# EAGLE board sensorstation_ok2 (EAGLE 6.2)
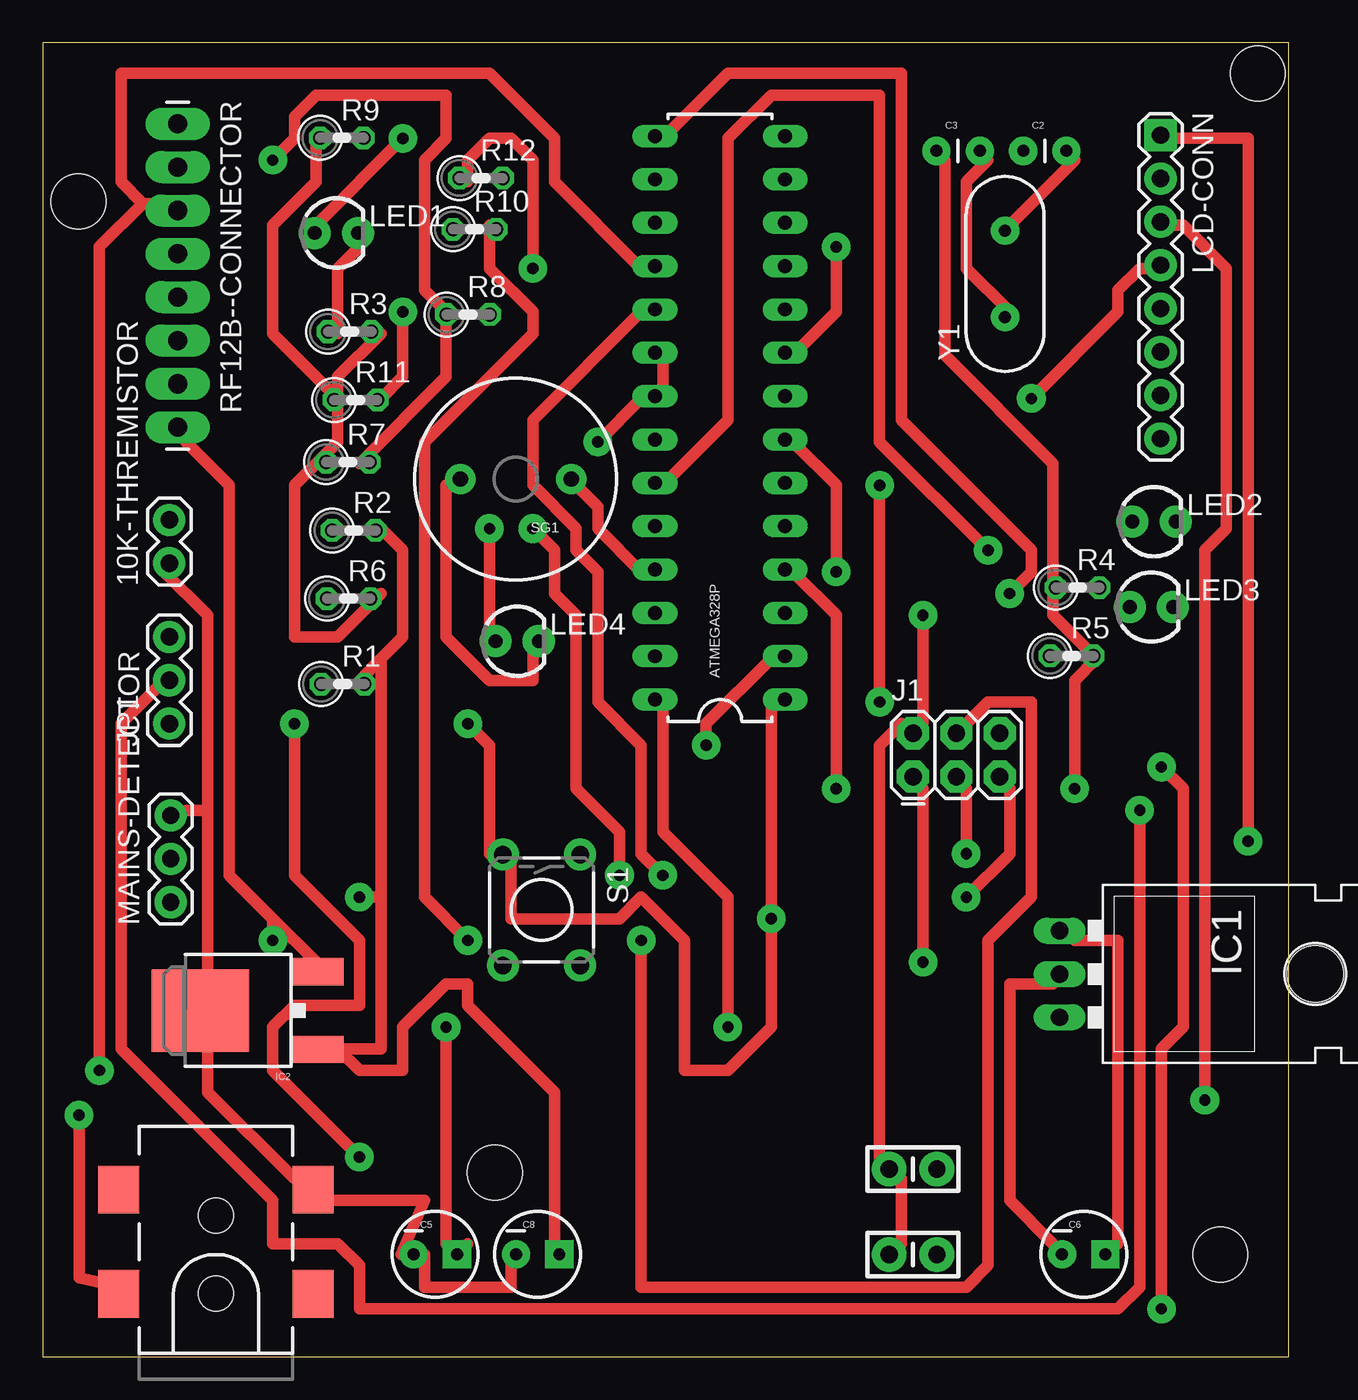
[diagram p0: board, top side]
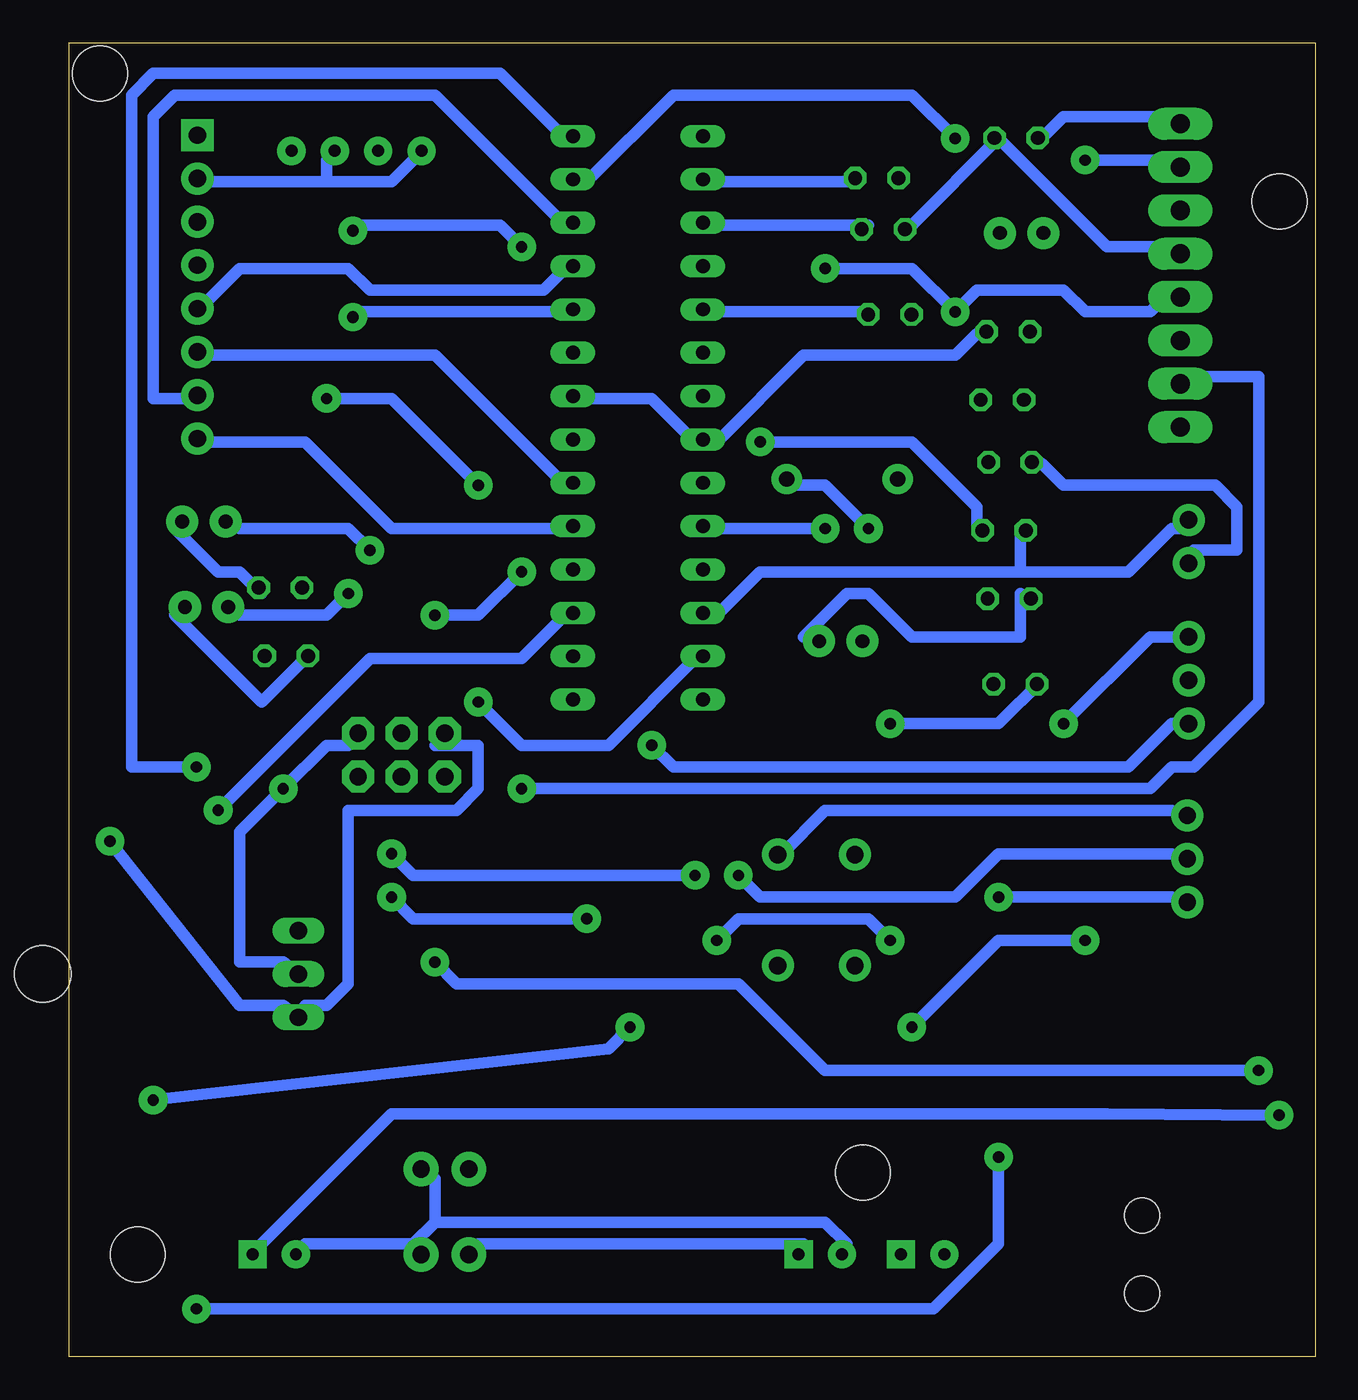
[diagram p1: board, bottom side, seen from below]

Size 73 x 77 mm. Coordinates in mm from the lower left corner, seen from the top.
Outline: 0,0 73,0 73,77 0,77 0,0
Copper layers (1*16): Top 0.035mm / dielectric 1.5mm / Bottom 0.035mm
Design rules: minimum track width 26mil, minimum drill 26mil, track to track 10mil, track to pad 20mil, pad to pad 10mil, via to via 20mil, smd to smd 8mil, copper to edge 40mil, drill to drill 8mil, minimum pad ring 10mil, minimum via ring 20mil, stop-mask expansion 1mil, vias tented up to drill 0mil, thermal gap 10mil
Holes 3.2 mm at 69,6 71.2,75.2 2.1,67.7 26.5,10.8

## Footprints (pad centres in the part's own frame; a part is rotated, then mirrored left to right if it is on the bottom)
1X02 = drill 1.016 pad 1.88: 1 0,0; 2 2.54,0
DIL28-3 = drill 0.813 long: 1 -16.51,-3.81; 2 -13.97,-3.81; 3 -11.43,-3.81; 4 -8.89,-3.81; 5 -6.35,-3.81; 6 -3.81,-3.81; 7 -1.27,-3.81; 8 1.27,-3.81; 9 3.81,-3.81; 10 6.35,-3.81; 11 8.89,-3.81; 12 11.43,-3.81; 13 13.97,-3.81; 14 16.51,-3.81; 15 16.51,3.81; 16 13.97,3.81; 17 11.43,3.81; 18 8.89,3.81; 19 6.35,3.81; 20 3.81,3.81; 21 1.27,3.81; 22 -1.27,3.81; 23 -3.81,3.81; 24 -6.35,3.81; 25 -8.89,3.81; 26 -11.43,3.81; 27 -13.97,3.81; 28 -16.51,3.81
CAP-PTH-SMALL = drill 0.7 pad 1.651: 1 0,0; 2 2.54,0
CAP-PTH-SMALL-KIT = drill 1.016 pad 2.032: 1 -1.397,0; 2 1.397,0
CPOL-RADIAL-10UF-25V = drill 0.7 pad 1.651 square: 1 1.27,0 | drill 0.7 pad 1.651: 2 -1.27,0
TO-220-ALT = drill 1.016 long: GND 0,-3.81; IN -2.54,-3.81; OUT 2.54,-3.81 | hole 3.302: 0,11.176
DPAK = smd 1.6 x 3: 1 -2.28,-5.31; 3 2.28,-5.31 | smd 4.826 x 5.715: 4 0,1.588
2X3 = drill 1.016 pad 1.88 octagon: 1 0,0; 2 0,2.54; 3 2.54,0; 4 2.54,2.54; 5 5.08,0; 6 5.08,2.54
POWER_JACK_SMD = smd 2.8 x 2.4: GND 0,-5.7; P$4 6.1,-5.7; VIN0 0,5.7; VIN1 6.1,5.7 | hole 2.032: 0,0; 4.572,0
1X03 = drill 1.016 pad 1.88: 1 0,0; 2 2.54,0; 3 5.08,0
1X08 = drill 1.016 pad 1.88 square: 1 0,0 | drill 1.016 pad 1.88: 2 2.54,0; 3 5.08,0; 4 7.62,0; 5 10.16,0; 6 12.7,0; 7 15.24,0; 8 17.78,0
LED3MM = drill 0.813 pad 1.88: A -1.27,0; K 1.27,0
0207/2V = drill 0.813 octagon: 1 -1.27,0; 2 1.27,0
1X08_LONGPADS = drill 1.118 pad 1.88 long: 1 0,0; 2 2.54,0; 3 5.08,0; 4 7.62,0; 5 10.16,0; 6 12.7,0; 7 15.24,0; 8 17.78,0
TACTILE-PTH = drill 1.016 pad 1.88: 1 -3.251,2.261; 2 3.251,2.261; 3 -3.251,-2.261; 4 3.251,-2.261
BUZZER-12MM = drill 0.9 pad 1.778: + 3.25,0; - -3.25,0
HC49US = drill 0.7 pad 1.651: 1 -2.54,0; 2 2.54,0

## Placement (x,y rotation side)
10K-THREMISTOR  J2  [1X02]  7.42,46.5 90 top
ATMEGA328P  AVR-MEGA8-PPTH  [DIL28-3]  39.69,55.02 90 top
C2  22pf  [CAP-PTH-SMALL]  57.45,70.66 0 top
C3  22pf  [CAP-PTH-SMALL]  52.37,70.66 0 top
C4  0,47uF  [CAP-PTH-SMALL-KIT]  51,11 0 top
C5  33uF  [CPOL-RADIAL-10UF-25V]  23,6 0 top
C6  33uF  [CPOL-RADIAL-10UF-25V]  61,6 0 top
C7  0,1uF  [CAP-PTH-SMALL-KIT]  51,6 0 top
C8  33uF  [CPOL-RADIAL-10UF-25V]  29,6 0 top
IC1  LM7805  [TO-220-ALT]  63.39,22.43 270 top
IC2  LM2931_FIXED  [DPAK]  10.83,20.29 90 top
J1  AVR_SPI_PRG_6PTH  [2X3]  51,34 0 top
J2  POWER_JACKSMD  [POWER_JACK_SMD]  10.15,3.7 90 top
JP1  J6  [1X03]  7.42,37.1 90 top
LCD-CONN  J5  [1X08]  65.5,71.58 270 top
LED1  MainsI  [LED3MM]  17.21,65.85 0 top
LED2  Led1  [LED3MM]  65.12,48.93 0 top
LED3  Led2  [LED3MM]  64.96,43.93 0 top
LED4  ToneLed  [LED3MM]  27.8,41.93 0 top
MAINS-DETECTOR  J3  [1X03]  7.5,26.64 90 top
R1  10k  [0207/2V]  17.58,39.42 0 top
R2  10k  [0207/2V]  18.23,48.42 0 top
R3  330  [0207/2V]  17.99,60.07 0 top
R4  330  [0207/2V]  60.64,45.07 0 top
R5  330  [0207/2V]  60.29,41.07 0 top
R6  330  [0207/2V]  17.93,44.42 0 top
R7  10k  [0207/2V]  17.88,52.42 0 top
R8  4,7k  [0207/2V]  24.93,61.07 0 top
R9  10k  [0207/2V]  17.53,71.42 0 top
R10  4,7k  [0207/2V]  25.31,66.07 0 top
R11  10k  [0207/2V]  18.34,56.07 0 top
R12  4,7k  [0207/2V]  25.69,69.07 0 top
RF12B--CONNECTOR  J4  [1X08_LONGPADS]  7.91,72.25 270 top
S1  [TACTILE-PTH]  29.23,26.18 270 top
SG1  BUZZERPTH  [BUZZER-12MM]  27.72,51.43 180 top
Y1  16Mhz  [HC49US]  56.39,63.45 90 top

## Library data of the parts
10K-THREMISTOR ATMEGA328P C2-C8 IC1 IC2 J1 J2 JP1 LCD-CONN LED1-LED4 MAINS-DETECTOR RF12B--CONNECTOR S1 SG1 Y1 = SparkFun
R1-R12 = resistor

## Nets
3.3V: C5.1 IC2.3 RF12B--CONNECTOR.8
5V: ATMEGA328P.7 ATMEGA328P.20 ATMEGA328P.21 C4.1 C7.1 C8.1 IC1.OUT IC2.1 J1.2 LCD-CONN.1 MAINS-DETECTOR.1 R1.2 R2.2
GND: 10K-THREMISTOR.1 ATMEGA328P.8 ATMEGA328P.22 C2.1 C3.1 C4.2 C5.2 C6.2 C7.2 C8.2 IC1.GND IC2.4 J1.6 J2.P$4 LCD-CONN.2 MAINS-DETECTOR.3 R3.2 R4.1 R5.2 R6.2 R7.1 R9.1 R11.1 RF12B--CONNECTOR.1 S1.1
N$1: ATMEGA328P.4 RF12B--CONNECTOR.7
N$2: C6.1 IC1.IN J2.VIN0
N$3: ATMEGA328P.19 J1.3 R8.2
N$4: ATMEGA328P.17 J1.4 R10.2
N$6: ATMEGA328P.9 C2.2 Y1.2
N$7: ATMEGA328P.10 C3.2 Y1.1
N$8: ATMEGA328P.24 MAINS-DETECTOR.2
N$9: 10K-THREMISTOR.2 ATMEGA328P.26 R2.1
N$10: LED1.K R3.1
N$11: LED4.K R6.1 SG1.+
N$12: LED2.K R4.2
N$13: LED3.K R5.1
N$14: ATMEGA328P.23 LED2.A
N$15: ATMEGA328P.15 LED3.A
N$16: ATMEGA328P.25 LED4.A SG1.-
N$17: ATMEGA328P.14 JP1.3
N$18: R7.2 R8.1 RF12B--CONNECTOR.2
N$19: R9.2 R10.1 RF12B--CONNECTOR.4
N$20: R11.2 R12.1 RF12B--CONNECTOR.5
N$21: ATMEGA328P.16 R12.2
N$22: ATMEGA328P.13 LED1.A
N$23: ATMEGA328P.18 J1.1 RF12B--CONNECTOR.3
N$24: ATMEGA328P.12 LCD-CONN.7
N$25: ATMEGA328P.11 LCD-CONN.5
N$26: ATMEGA328P.6 LCD-CONN.6
N$27: ATMEGA328P.5 LCD-CONN.8
N$28: ATMEGA328P.3 JP1.2
N$29: ATMEGA328P.2 JP1.1
N$30: ATMEGA328P.27 LCD-CONN.4
N$31: ATMEGA328P.28 LCD-CONN.3
N$34: ATMEGA328P.1 J1.5 R1.1 S1.3

## Tracks (layer width: path | path; a pad name or v marks a point on that pad's centre or on a via)
3.3V  (via drill 0.66)
  Top 0.66: 24.91,6.62 C5.1 23.64,6.62 v23.64,19.32 | 13.48,25.67 10.94,28.21 10.94,51.07 8.4,53.61 RF12B--CONNECTOR.8 | 13.48,25.67 16.02,23.13 IC2.3 | 13.48,25.67 v13.48,24.4
  Bottom 0.66: v23.64,19.32 18.56,24.4 v13.48,24.4
5V  (via drill 0.66)
  Top 0.66: ATMEGA328P.20 36.34,58.69 36.34,56.15 ATMEGA328P.21 35.07,56.15 v32.53,53.61 | 19.83,40.91 21.1,42.18 21.1,47.26 19.83,48.53 R2.2 | 19.83,40.91 18.56,39.64 R1.2 | 17.29,18.05 19.83,18.05 19.83,26.94 | 19.83,40.91 19.83,26.94 | 19.83,26.94 v18.56,26.94 | C7.1 50.31,6.62 50.31,10.43 C4.1 49.04,11.7 49.04,35.83 50.31,37.1 J1.2 51.58,37.1 v51.58,43.45 | v46.5,45.99 46.5,51.07 43.96,53.61 ATMEGA328P.7 | v70.63,30.21 70.63,71.39 65.55,71.39 LCD-CONN.1 | 17.29,18.05 18.56,16.78 21.1,16.78 21.1,19.32 23.64,21.86 24.91,21.86 24.91,20.59 29.99,15.51 29.99,6.62 C8.1 | 17.29,18.05 IC2.1
  Bottom 0.66: v32.53,53.61 23.64,53.61 19.83,49.8 19.83,48.53 R2.2 | v18.56,26.94 8.4,26.94 MAINS-DETECTOR.1 | C8.1 29.99,6.62 49.04,6.62 C7.1 | v46.5,45.99 49.04,43.45 v51.58,43.45 | J1.2 51.58,35.83 49.04,35.83 49.04,33.29 50.31,32.02 56.66,32.02 56.66,21.86 57.93,20.59 59.2,20.59 IC1.OUT 60.47,20.59 63.01,20.59 v70.63,30.21
GND  (via drill 0.66)
  Top 0.66: 16.02,52.34 17.29,53.61 17.29,56.15 | 16.02,52.34 14.75,51.07 14.75,42.18 17.29,42.18 19.83,44.72 R6.2 | 16.02,52.34 R7.1 | 17.29,56.15 17.29,57.42 19.83,59.96 R3.2 | 17.29,56.15 13.48,59.96 13.48,66.31 16.02,68.85 16.02,71.39 R9.1 | 17.29,56.15 R11.1 | 9.67,32.02 9.67,20.59 IC2.4 9.67,19.32 9.67,15.51 14.75,10.43 J2.P$4 16.02,9.16 22.37,9.16 21,6 C5.2 22.37,6 22.37,4.08 27.45,4.08 27.45,5.35 C8.2 | 9.67,32.02 9.67,43.45 7.13,45.99 10K-THREMISTOR.1 | 9.67,32.02 8.4,32.02 MAINS-DETECTOR.3 | 61.74,40.91 59.2,43.45 59.2,44.72 | 59.2,44.72 59.2,52.34 52.85,58.69 52.85,70.12 C3.1 | 59.2,44.72 R4.1 | IC1.GND 59.2,21.86 56.66,21.86 56.66,9.16 59.2,6.62 C6.2 | 61.74,40.91 60.47,39.64 v60.47,33.29 | 61.74,40.91 R5.2
  Bottom 0.66: R9.1 16.02,71.39 14.75,72.66 8.4,72.66 RF12B--CONNECTOR.1 | ATMEGA328P.8 42.69,56.15 38.88,56.15 36.34,53.61 ATMEGA328P.22 35.07,53.61 29.99,58.69 21.1,58.69 19.83,59.96 R3.2 | S1.1 31.26,29.48 28.72,32.02 8.4,32.02 MAINS-DETECTOR.3 | 57.93,68.85 65.55,68.85 LCD-CONN.2 | 57.93,68.85 54.12,68.85 52.85,70.12 C3.1 | 57.93,68.85 57.93,70.12 C2.1 | 51.58,7.89 28.72,7.89 27.45,6.62 C8.2 | 52.85,6.62 51.58,7.89 | 51.58,7.89 51.58,10.43 C4.2 | J1.6 56.66,35.83 57.93,35.83 v60.47,33.29 63.01,30.75 63.01,23.13 60.47,23.13 IC1.GND | 52.85,6.62 59.2,6.62 C6.2 | 52.85,6.62 C7.2 | R7.1 16.02,52.34 14.75,51.07 5.86,51.07 4.59,49.8 4.59,47.26 7.13,47.26 10K-THREMISTOR.1
N$1  (via drill 0.66)
  Top 0.66: v46.5,33.29 46.5,43.45 43.96,45.99 ATMEGA328P.4
  Bottom 0.66: v46.5,33.29 9.67,33.29 8.4,34.56 7.13,34.56 3.32,38.37 3.32,57.42 7.13,57.42 RF12B--CONNECTOR.7
N$2  (via drill 0.66)
  Top 0.66: v2.13,14.16 2.13,4.62 4.59,4.08 J2.VIN0 | IC1.IN 60.47,24.4 63.01,24.4 63.01,6.62 C6.1
  Bottom 0.66: v2.13,14.16 12.21,14.24 54.12,14.24 61.74,6.62 C6.1
N$3  (via drill 0.66)
  Top 0.66: v54.12,29.48 54.12,33.29 J1.3 | v36.34,28.21 35.07,29.48 35.07,35.83 32.53,38.37 32.53,45.99 31.26,47.26 31.26,48.53 28.72,51.07 28.72,54.88 35.07,61.23 ATMEGA328P.19
  Bottom 0.66: R8.2 26.18,61.23 35.07,61.23 ATMEGA328P.19 | v54.12,29.48 52.85,28.21 v36.34,28.21
N$4  (via drill 0.66)
  Top 0.66: v35.07,24.4 35.07,4.08 54.12,4.08 55.39,5.35 55.39,24.4 57.93,26.94 57.93,38.37 55.39,38.37 54.12,37.1 J1.4 | v24.91,24.4 22.37,26.94 22.37,53.61 28.72,59.96 28.72,61.23 26.18,63.77 26.18,66.31 R10.2
  Bottom 0.66: R10.2 26.18,66.31 35.07,66.31 ATMEGA328P.17 | v35.07,24.4 33.8,25.67 26.18,25.67 v24.91,24.4
N$6  (via drill 0.66)
  Top 0.66: v46.5,65.04 46.5,61.23 43.96,58.69 ATMEGA328P.9 | C2.2 60.47,70.12 56.66,66.31 Y1.2
  Bottom 0.66: v46.5,65.04 47.77,66.31 56.66,66.31 Y1.2
N$7
  Top 0.66: C3.2 55.39,70.12 54.12,68.85 54.12,63.77 56.66,61.23 Y1.1
  Bottom 0.66: ATMEGA328P.10 43.96,61.23 56.66,61.23 Y1.1
N$8  (via drill 0.66)
  Top 0.66: v28.72,48.53 29.99,47.26 29.99,44.72 31.26,43.45 31.26,33.29 33.8,30.75 v33.8,28.21
  Bottom 0.66: v28.72,48.53 35.07,48.53 ATMEGA328P.24 | v33.8,28.21 32.53,26.94 21.1,26.94 18.56,29.48 8.4,29.48 MAINS-DETECTOR.2
N$9
  Bottom 0.66: 17.29,45.99 10.94,45.99 8.4,48.53 7.13,48.53 10K-THREMISTOR.2 | 17.29,45.99 32.53,45.99 35.07,43.45 ATMEGA328P.26 | 17.29,45.99 17.29,48.53 R2.1
N$10
  Top 0.66: R3.1 17.29,59.96 17.29,63.77 18.56,65.04 LED1.K
N$11
  Top 0.66: SG1.+ 23.64,51.07 23.64,42.18 26.18,39.64 28.72,39.64 28.72,42.18 LED4.K
  Bottom 0.66: R6.1 17.29,44.72 17.29,42.18 23.64,42.18 26.18,44.72 27.45,44.72 29.99,42.18 LED4.K
N$12
  Bottom 0.66: R4.2 61.74,44.72 63.01,45.99 64.28,45.99 66.82,48.53 LED2.K
N$13
  Bottom 0.66: R5.1 59.2,40.91 61.74,38.37 66.82,43.45 LED3.K
N$14  (via drill 0.66)
  Top 0.66: v55.39,47.26 49.04,53.61 49.04,73.93 42.69,73.93 40.15,71.39 40.15,54.88 36.34,51.07 ATMEGA328P.23
  Bottom 0.66: v55.39,47.26 56.66,48.53 63.01,48.53 LED2.A
N$15  (via drill 0.66)
  Top 0.66: v56.66,44.72 57.93,45.99 57.93,47.26 50.31,54.88 50.31,75.2 40.15,75.2 36.34,71.39 ATMEGA328P.15
  Bottom 0.66: v56.66,44.72 57.93,43.45 63.01,43.45 LED3.A
N$16  (via drill 0.66)
  Top 0.66: ATMEGA328P.25 35.07,45.99 32.53,48.53 32.53,49.8 31.26,51.07 SG1.- | v26.18,48.53 26.18,42.18 LED4.A
  Bottom 0.66: v26.18,48.53 28.72,51.07 31.26,51.07 SG1.-
N$17  (via drill 0.66)
  Top 0.66: v65.55,34.56 66.82,33.29 66.82,19.32 65.55,18.05 v65.55,2.81 | v18.56,11.7 13.48,16.78 13.48,19.32 14.75,20.59 18.56,20.59 18.56,24.4 14.75,28.21 v14.75,37.1
  Bottom 0.66: v65.55,34.56 69.36,34.56 69.36,73.93 68.09,75.2 47.77,75.2 43.96,71.39 ATMEGA328P.14 | v65.55,2.81 22.37,2.81 18.56,6.62 v18.56,11.7 | v14.75,37.1 9.67,42.18 JP1.3 7.13,42.18
N$18  (via drill 0.66)
  Top 0.66: 23.64,61.23 23.64,57.42 18.56,52.34 R7.2 | v13.48,70.12 14.75,71.39 14.75,72.66 16.02,73.93 23.64,73.93 23.64,71.39 22.37,70.12 22.37,62.5 23.64,61.23 | 23.64,61.23 R8.1
  Bottom 0.66: v13.48,70.12 8.4,70.12 RF12B--CONNECTOR.2
N$19
  Bottom 0.66: 18.56,71.39 23.64,66.31 R10.1 | 18.56,71.39 12.21,65.04 8.4,65.04 RF12B--CONNECTOR.4 | 18.56,71.39 R9.2
N$20  (via drill 0.66)
  Top 0.66: v21.1,61.23 21.1,57.42 19.83,56.15 R11.2 | v28.72,63.77 28.72,70.12 27.45,71.39 26.18,71.39 24.91,70.12 24.91,68.85 R12.1
  Bottom 0.66: RF12B--CONNECTOR.5 8.4,62.5 9.67,61.23 13.48,61.23 14.75,62.5 19.83,62.5 v21.1,61.23 23.64,63.77 v28.72,63.77
N$21
  Bottom 0.66: ATMEGA328P.16 35.07,68.85 27.45,68.85 R12.2
N$22  (via drill 0.66)
  Top 0.66: v21.1,71.39 16.02,66.31 LED1.A
  Bottom 0.66: v21.1,71.39 23.64,73.93 37.61,73.93 42.69,68.85 ATMEGA328P.13
N$23  (via drill 0.66)
  Top 0.66: 5.86,67.58 4.59,68.85 4.59,75.2 26.18,75.2 29.99,71.39 29.99,68.85 35.07,63.77 ATMEGA328P.18 | 5.86,67.58 7.13,67.58 RF12B--CONNECTOR.3 | v51.58,23.13 51.58,33.29 J1.1 | v3.32,16.78 3.32,65.04 5.86,67.58
  Bottom 0.66: v51.58,23.13 50.31,21.86 33.8,21.86 28.72,16.78 v3.32,16.78
N$24
  Bottom 0.66: ATMEGA328P.12 43.96,66.31 51.58,73.93 66.82,73.93 68.09,72.66 68.09,56.15 65.55,56.15 LCD-CONN.7
N$25
  Bottom 0.66: ATMEGA328P.11 43.96,63.77 45.23,62.5 55.39,62.5 56.66,63.77 63.01,63.77 65.55,61.23 LCD-CONN.5
N$26
  Bottom 0.66: ATMEGA328P.6 43.96,51.07 51.58,58.69 65.55,58.69 LCD-CONN.6
N$27
  Bottom 0.66: ATMEGA328P.5 43.96,48.53 54.12,48.53 59.2,53.61 65.55,53.61 LCD-CONN.8
N$28  (via drill 0.66)
  Top 0.66: v64.28,32.02 64.28,4.08 63.01,2.81 18.56,2.81 18.56,5.35 17.29,6.62 13.48,6.62 13.48,9.16 4.59,18.05 4.59,37.1 7.13,39.64 JP1.2
  Bottom 0.66: v64.28,32.02 55.39,40.91 46.5,40.91 43.96,43.45 ATMEGA328P.3
N$29  (via drill 0.66)
  Top 0.66: v38.88,35.83 38.88,37.1 42.69,40.91 ATMEGA328P.2
  Bottom 0.66: v38.88,35.83 37.61,34.56 10.94,34.56 8.4,37.1 JP1.1 7.13,37.1
N$30  (via drill 0.66)
  Top 0.66: v49.04,51.07 v49.04,38.37 | v57.93,56.15 63.01,61.23 63.01,62.5 64.28,63.77 65.55,63.77 LCD-CONN.4
  Bottom 0.66: v49.04,38.37 46.5,35.83 41.42,35.83 36.34,40.91 ATMEGA328P.27 | v49.04,51.07 54.12,56.15 v57.93,56.15
N$31  (via drill 0.66)
  Top 0.66: v40.15,19.32 40.15,26.94 36.34,30.75 36.34,38.37 ATMEGA328P.28 | v68.09,15.05 68.09,47.26 69.36,48.53 69.36,63.77 66.82,66.31 65.55,66.31 LCD-CONN.3
  Bottom 0.66: v40.15,19.32 41.42,18.05 v68.09,15.05
N$34  (via drill 0.66)
  Top 0.66: ATMEGA328P.1 42.69,38.37 v42.69,25.67 42.69,19.32 40.15,16.78 37.61,16.78 37.61,24.4 35.07,26.94 33.8,25.67 27.45,25.67 27.45,29.48 S1.3 26.18,29.48 26.18,35.83 v24.91,37.1 | v54.12,26.94 56.66,29.48 56.66,33.29 J1.5
  Bottom 0.66: v24.91,37.1 18.56,37.1 16.02,39.64 R1.1 | v54.12,26.94 52.85,25.67 v42.69,25.67